# EAGLE board RH001.2 (EAGLE 7.1.0)
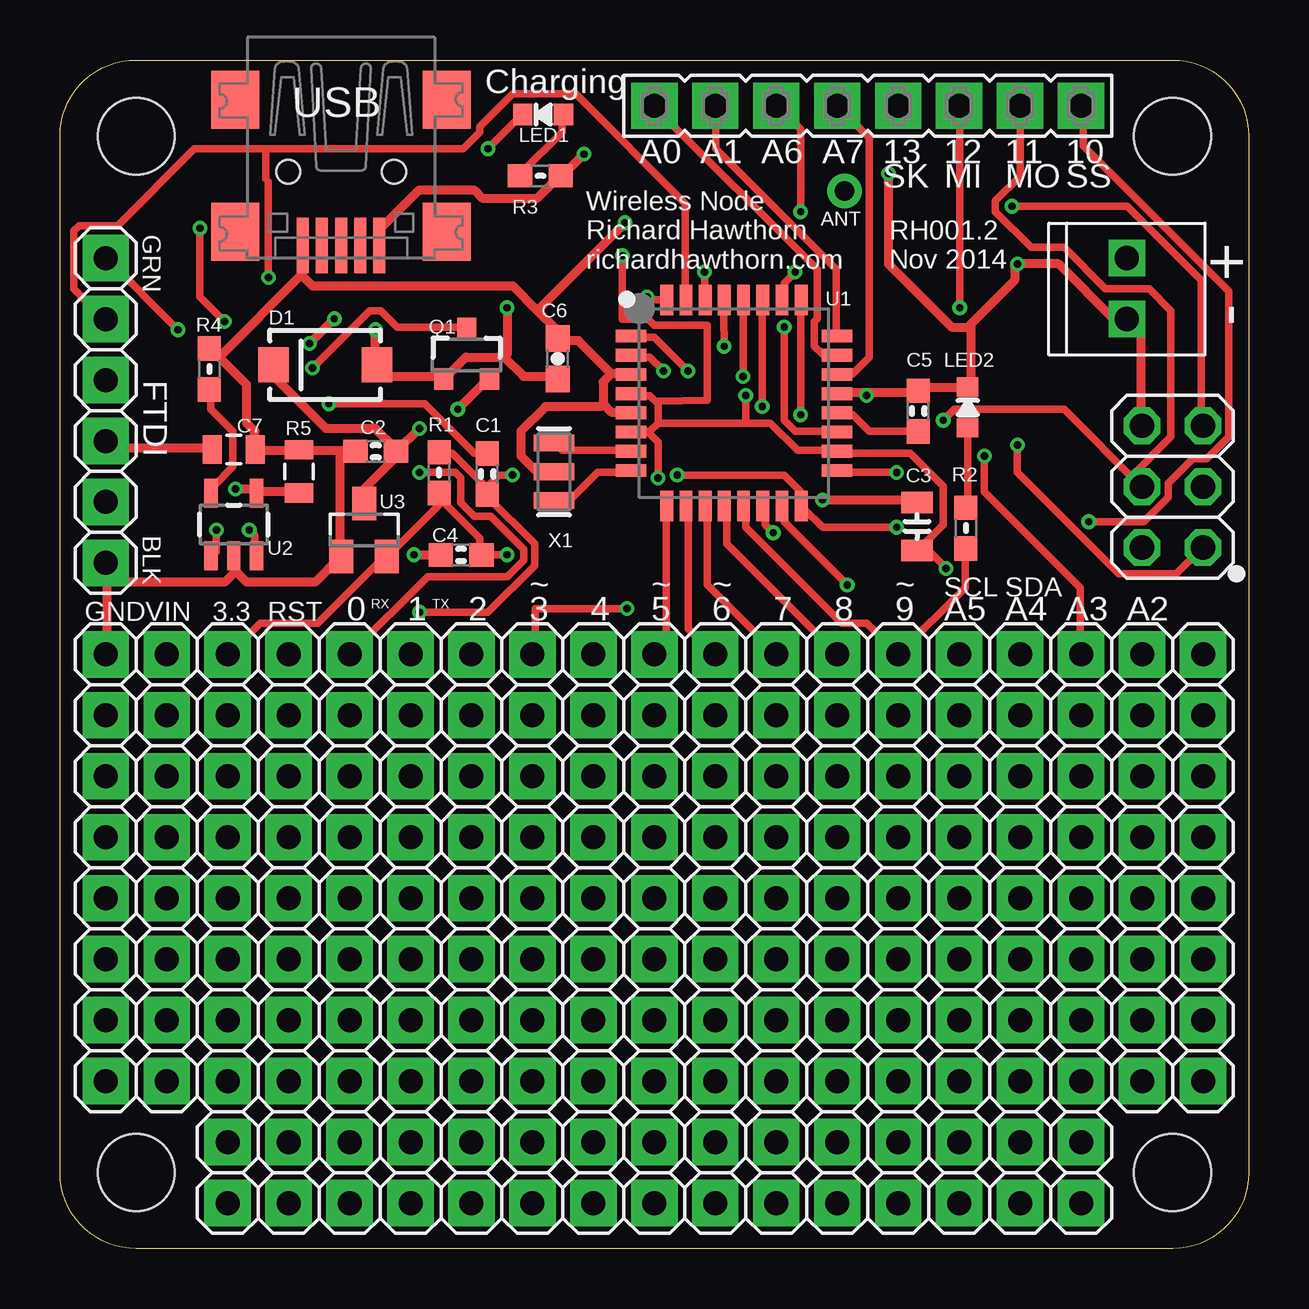
[diagram p0: board, top side]
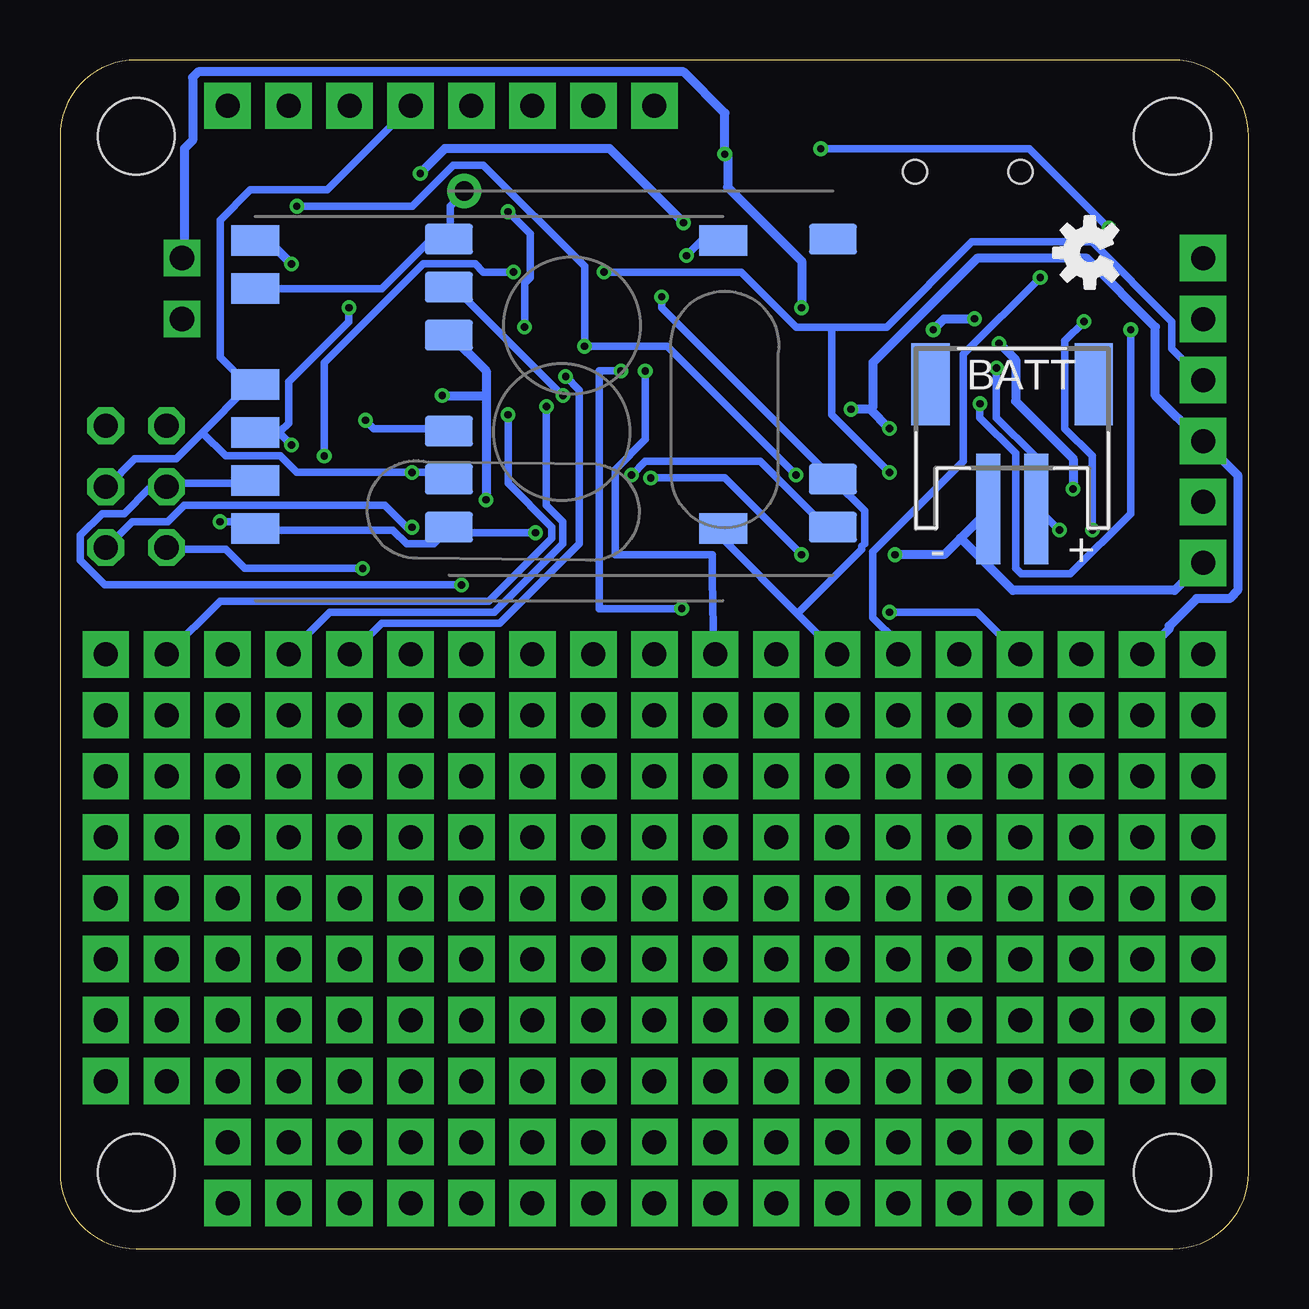
[diagram p1: board, bottom side, seen from below]

Size 49.53 x 49.53 mm. Coordinates in mm from the lower left corner, seen from the top.
Outline: 0,3.17 0,46.35 arc-90 3.17,49.53 46.35,49.53 arc-90 49.53,46.35 49.53,3.17 arc-90 46.35,0 3.17,0 arc-90 0,3.17
Copper layers (1*16): Top 0.035mm / dielectric 1.5mm / Bottom 0.035mm
Design rules "ITEADstudio_DRC *": minimum track width 12mil, minimum drill 12mil, track to track 6mil, track to pad 6mil, pad to pad 6mil, via to via 6mil, smd to smd 0mil, copper to edge 10mil, drill to drill 10mil, minimum pad ring 10mil, minimum via ring 6mil, stop-mask expansion 2mil, vias tented up to drill 100mil, thermal gap 15mil
Net classes: 1 power: width 0.381 mm, clearance 0.254 mm
Holes 3.2 mm at 3.17,3.17 46.35,3.17 3.17,46.35 46.35,46.35
tRestrict: area 24.3,8.9 to 29.1,12.8; area 5.8,16.9 to 6.9,18.5; area 5.2,9.7 to 6.7,10.4
bRestrict: area 27.4,17.7 to 29.2,18.7; area 21.1,13.8 to 22.9,14.9; area 21.6,12.6 to 22.1,13.2; area 20.7,12.6 to 21.2,13.2; area 20.2,12.8 to 20.7,13.5; area 20.1,13.4 to 20.6,14; area 26.5,18.9 to 27.1,19.5; area 26.5,17.9 to 27.1,18.5; area 27.5,19.1 to 28,19.8; area 27.9,18.8 to 29.1,19.6

## Footprints (pad centres in the part's own frame; a part is rotated, then mirrored left to right if it is on the bottom)
0603-CAP = smd 1.016 x 0.965: 1 -0.85,0; 2 0.85,0
0805-CAP = smd 0.902 x 1.3: 1 -1,0; 2 1,0
0603-CAP' = smd 1.1 x 1: 1 -0.85,0; 2 0.85,0
0805 = smd 0.8 x 1.2: 1 -0.9,0; 2 0.9,0
USB-MINIB = smd 0.5 x 2.308: D+ 0,4.064; D- -0.8,4.064; GND 1.6,4.064; ID 0.8,4.064; VBUS -1.6,4.064 | smd 2 x 2.4: GND1 -4.4,-2; GND2 -4.4,3.5; GND3 4.4,3.5; GND4 4.4,-2 | hole 1: -2.2,1; 2.2,1
JST-PH-2-SMT-RA = smd 1 x 4.6: 1 1,-3.7; 2 -1,-3.7 | smd 1.6 x 3.4: NC1 -3.4,1.5; NC2 3.4,1.5
1X06 = drill 1 pad 1.93 square: 1 -6.35,0; 2 -3.81,0; 3 -1.27,0; 4 1.27,0; 5 3.81,0; 6 6.35,0
FE08 = drill 1 pad 1.93 square: 1 -8.89,0; 2 -6.35,0; 3 -3.81,0; 4 -1.27,0; 5 1.27,0; 6 3.81,0; 7 6.35,0; 8 8.89,0
SMA-DIODE = smd 1.27 x 1.47: A -2.15,0; C 2.15,0
2X03 = drill 1.016 octagon: 1 -2.54,-1.27; 2 -2.54,1.27; 3 0,-1.27; 4 0,1.27; 5 2.54,-1.27; 6 2.54,1.27
1X02_2.54_SCREWTERM = drill 1.016 square: P1 2.54,0; P2 0,0
1X15 = drill 1 pad 1.93 square: 1 -17.78,0; 2 -15.24,0; 3 -12.7,0; 4 -10.16,0; 5 -7.62,0; 6 -5.08,0; 7 -2.54,0; 8 0,0; 9 2.54,0; 10 5.08,0; 11 7.62,0; 12 10.16,0; 13 12.7,0; 14 15.24,0; 15 17.78,0
1X19 = drill 1 pad 1.93 square: 1 -22.86,0; 2 -20.32,0; 3 -17.78,0; 4 -15.24,0; 5 -12.7,0; 6 -10.16,0; 7 -7.62,0; 8 -5.08,0; 9 -2.54,0; 10 0,0; 11 2.54,0; 12 5.08,0; 13 7.62,0; 14 10.16,0; 15 12.7,0; 16 15.24,0; 17 17.78,0; 18 20.32,0; 19 22.86,0
0603-LED = smd 0.8 x 0.9: MINUS -0.85,0; PLUS 0.85,0
SOT23-3 = smd 0.8 x 0.9: 1 -0.95,-1; 2 0.95,-1; 3 0,1.1
0603-RES = smd 1.016 x 0.965: 1 -0.85,0; 2 0.85,0
RFM12B-MINPADS = smd 2 x 1.27: ANT 8,-6; GND 8,-2; IRQ -8,4; SCK 8,4; SDI 8,2; SDI1 -8.002,-6.001; SDO -8,6; SEL 8,6; VDD 8,-4
RFM69W-MINPADS = smd 2 x 1.27: ANA 8,-5; DIO0 -11.5,5; GND 8,-7; MISO 8,1; MOSI 8,3; NSS 8,5; SCK 8,-1; VDD -11.5,-7
TQFP32-08 = smd 1.27 x 0.533: 1 -4.293,2.8; 2 -4.293,2; 3 -4.293,1.2; 4 -4.293,0.4; 5 -4.293,-0.4; 6 -4.293,-1.2; 7 -4.293,-2; 8 -4.293,-2.8; 17 4.293,-2.8; 18 4.293,-2; 19 4.293,-1.2; 20 4.293,-0.4; 21 4.293,0.4; 22 4.293,1.2; 23 4.293,2; 24 4.293,2.8 | smd 0.533 x 1.27: 9 -2.8,-4.293; 10 -2,-4.293; 11 -1.2,-4.293; 12 -0.4,-4.293; 13 0.4,-4.293; 14 1.2,-4.293; 15 2,-4.293; 16 2.8,-4.293; 25 2.8,4.293; 26 2,4.293; 27 1.2,4.293; 28 0.4,4.293; 29 -0.4,4.293; 30 -1.2,4.293; 31 -2,4.293; 32 -2.8,4.293
SOT23-5 = smd 0.55 x 1.2: 1 -0.95,-1.3; 2 0,-1.3; 3 0.95,-1.3; 4 0.95,1.3; 5 -0.95,1.3
SOT23 = smd 1 x 1.4: 1 -0.95,-1.1; 2 0.95,-1.1; 3 0,1.1
RFM12B-ANTENNA = drill 0.8 pad 1.422: P$1 0,0
RESONATOR-SMD = smd 0.7 x 1.7: 1 -1.2,0; 2 0,0; 3 1.2,0

## Placement (x,y rotation side)
C1  0.1  [0603-CAP]  17.81,32.28 90 top
C2  1u  [0603-CAP]  13.16,33.22 180 top
C3  10u  [0805-CAP]  35.71,30.1 90 top
C4  0.1  [0603-CAP]  16.71,28.91 180 top
C5  0.1  [0603-CAP]  35.76,34.9 90 top
C6  4u7  [0603-CAP']  20.74,37.08 90 top
C7  1 uF  [0805]  7.24,33.3 0 top
CN1  USB  [USB-MINIB]  11.71,45.87 180 top
CN3  BATT  [JST-PH-2-SMT-RA]  9.86,34.52 0 bottom
CN4  FTDI  [1X06]  1.91,34.92 90 top
CN5  1  [FE08]  33.66,47.62 0 top
D1  SCHOTTKY  [SMA-DIODE]  11.05,36.83 180 top
ICSP1  ICSP  [2X03]  46.35,31.75 90 top
IN1  M022.54MM_SCREWTERM  [1X02_2.54_SCREWTERM]  44.45,38.73 90 top
JP1  [1X15]  24.77,1.91 0 top
JP3  [1X19]  24.77,22.23 0 top
JP4  [1X19]  24.77,19.68 0 top
JP5  [1X19]  24.77,17.14 0 top
JP6  [1X19]  24.77,14.61 0 top
JP7  [1X19]  24.77,12.06 0 top
JP8  [1X19]  24.77,9.53 0 top
JP9  [1X19]  24.77,6.99 0 top
JP10  [1X15]  24.77,4.45 0 top
JP11  [1X19]  24.77,24.77 180 top
LED1  LED0603  [0603-LED]  20.13,47.26 0 top
LED2  LED0603  [0603-LED]  37.82,35.05 270 top
Q1  MOSFET  [SOT23-3]  16.94,37.24 0 top
R1  10k  [0603-RES]  15.8,32.33 90 top
R2  1k5  [0603-RES]  37.74,30.02 270 top
R3  1k5  [0603-RES]  20.02,44.7 180 top
R4  2K  [0603-RES]  6.22,36.65 270 top
R5  100 K  [0805]  9.96,32.38 270 top
RF1  RFM12B  [RFM12B-MINPADS]  25.32,36.07 180 bottom
RF2  RFM69  [RFM69W-MINPADS]  33.4,35 180 bottom
U1  ATMega-328  [TQFP32-08]  28.08,35.23 0 top
U2  MCP73831  [SOT23-5]  7.24,30.18 0 top
U3  MCP1703CB  [SOT23]  12.67,29.95 0 top
U$1  RFM12B_ANTENNA  [RFM12B-ANTENNA]  32.69,44.07 0 top
U$3  [OSHW-LOGO-S]  6.63,41.5 90 bottom
X1  16 MHz  [RESONATOR-SMD]  20.59,32.37 270 top

## Library data of the parts
C1-C5 CN1 LED1 LED2 R1-R4 RF1 RF2 U1 U$1 = LowPowerLab
C6 U2 X1 = SparkFun
C7 = SparkFun-Capacitors
CN3 = adafruit
CN4 ICSP1 JP1 JP3-JP11 = pinhead
CN5 = con-lsta; OC_FARNELL: unknown; OC_NEWARK: unknown
D1 Q1 = SparkFun-DiscreteSemi
IN1 = SparkFun-Connectors
R5 = SparkFun-Resistors
U3 = linear
U$3 = SparkFun-Aesthetics

## Nets
A0: CN5.1 U1.23
A1: CN5.2 U1.24
A2: JP11.2 U1.25
A3: JP11.3 U1.26
A4_SDA: JP11.4 U1.27
A5_SCL: JP11.5 U1.28
A6: CN5.3 U1.19
A7: CN5.4 U1.22
AREF: C5.1 U1.20
D0_RX: CN4.4 JP11.15 U1.30
D1_TX: CN4.5 JP11.14 U1.31
D2: JP11.13 RF1.IRQ RF2.DIO0 U1.32
D3: JP11.12 U1.1
D4: JP11.11 U1.2
D5: JP11.10 U1.9
D6: JP11.9 U1.10
D7: JP11.8 U1.11
D8: JP11.7 U1.12
D9: JP11.6 R2.2 U1.13
D10_SS: CN5.8 RF1.SEL RF2.NSS U1.14
D11_MOSI: CN5.7 ICSP1.4 RF1.SDI RF2.MOSI U1.15
D12_MISO: CN5.6 ICSP1.1 RF1.SDO RF2.MISO U1.16
D13_SCK: CN5.5 ICSP1.3 RF1.SCK RF2.SCK U1.17
GND [power]: C2.2 C3.2 C4.2 C5.2 C6.2 C7.2 CN1.GND CN3.2 CN4.1 ICSP1.6 IN1.P2 JP11.19 LED2.MINUS R4.1 R5.1 RF1.GND RF2.GND U1.3 U1.5 U1.21 U2.2 U3.1 X1.2
N$1: U1.7 X1.1
N$2: LED2.PLUS R2.1
N$3: RF1.ANT RF2.ANA U$1.P$1
N$4: LED1.PLUS R3.2
N$20: C1.2 CN4.6
N$21: U1.8 X1.3
PROG: R4.2 U2.5
PWR [power]: C2.1 C7.1 CN4.3 D1.C JP11.18 Q1.2 U3.3
RST: C1.1 ICSP1.5 JP11.16 R1.2 U1.29
STAT: LED1.MINUS U2.1
VBAT: CN3.1 Q1.3 U2.3
VBUS [power]: C6.1 CN1.VBUS D1.A IN1.P1 Q1.1 R3.1 R5.2 U2.4
VCC: C3.1 C4.1 ICSP1.2 JP11.17 R1.1 RF1.VDD RF2.VDD U1.4 U1.6 U1.18 U3.2

## Tracks (layer width: path | path; a pad name or v marks a point on that pad's centre or on a via)
A0
  Top 0.305: U1.23 32.35,37.26 31.77,37.26 31.43,37.6 31.43,38.63 31.55,38.75 31.55,40.8 24.8,47.55 CN5.1
A1
  Top 0.305: U1.24 32.35,38.06 32.35,40.8 27.32,45.83 27.32,47.55 CN5.2
A2  (via drill 0.3)
  Top 0.305: v30.86,34.75 30.86,39.43 U1.25
  Bottom 0.305: v30.86,34.75 30.86,31.89 29.03,30.06 29.03,29.6 31.66,26.98 42.86,26.98 45.03,24.8 JP11.2
A3  (via drill 0.3)
  Top 0.305: v30.63,40.69 30.18,40.23 30.18,39.55 U1.26 | v38.52,33.03 38.52,31.55 42.52,27.55 42.52,24.8 JP11.3
  Bottom 0.305: v30.63,40.69 31.89,40.69 32.23,41.03 34.4,41.03 38.52,36.92 v38.52,33.03
A4_SDA  (via drill 0.3)
  Top 0.305: v29.26,35.09 29.26,39.43 U1.27
  Bottom 0.305: v29.26,35.09 29.26,30.98 28.57,30.29 28.57,29.38 31.43,26.52 38.29,26.52 40.01,24.8 JP11.4
A5_SCL  (via drill 0.3)
  Top 0.305: v28.46,36.35 28.46,39.43 U1.28
  Bottom 0.305: v28.46,36.35 27.89,35.78 27.89,29.38 31.2,26.06 36.12,26.06 37.38,24.8 JP11.5
A6  (via drill 0.3)
  Top 0.305: v30.18,38.41 30.18,34.52 30.63,34.06 32.35,34.06 U1.19 | v30.86,43.2 30.86,46.63 29.95,47.55 CN5.3
  Bottom 0.305: v30.18,38.41 30.18,40.23 29.95,40.46 29.95,42.29 v30.86,43.2
A7
  Top 0.305: CN5.4 33.72,46.29 33.72,37.15 33.03,36.46 32.46,36.46 U1.22
AREF
  Top 0.305: C5.1 35.66,34.06 33.72,34.06 33.03,34.75 32.46,34.75 U1.20
D0_RX  (via drill 0.3)
  Top 0.305: v26.86,40.69 26.86,39.55 U1.30 | v14.97,32.35 16.46,32.35 16.69,32.12 16.69,31.09 17.26,30.52 17.95,30.52 19.32,29.15 19.32,28.69 18.63,28 15.32,28 12.12,24.8 JP11.15
  Bottom 0.305: v26.86,40.69 21.14,40.69 18.86,38.41 17.37,38.41 | 17.37,38.41 15.09,38.41 11.54,41.95 6.51,41.95 3.2,38.63 3.2,37.49 CN4.4 | v14.97,32.35 17.37,34.75 17.37,38.41
D1_TX  (via drill 0.3)
  Top 0.305: 8.57,45.83 5.6,45.83 2.4,42.63 0.8,42.63 0.57,42.41 0.57,40.01 1.83,38.75 CN4.5 | 8.57,45.83 16.8,45.83 17.49,46.52 17.49,46.75 18.86,48.12 21.49,48.12 26.06,43.55 26.06,39.55 U1.31 | v8.69,40.46 8.69,44.46 8.57,44.58 8.57,45.83
  Bottom 0.305: v8.69,40.46 11.89,37.26 11.89,32.8 15.66,29.03 15.66,26.29 14.63,25.26 14.63,24.8 JP11.14
D2  (via drill 0.3)
  Top 0.305: v24.46,39.66 24.57,39.55 25.26,39.55 U1.32
  Bottom 0.305: 18.8,26.46 17.14,24.8 JP11.13 | 18.8,26.46 21.83,29.49 21.83,29.95 RF2.DIO0 | v24.46,39.66 24.46,39.2 17.37,32.12 RF1.IRQ 17.26,32 16,30.75 16,29.38 16.12,29.26 16.12,29.15 18.8,26.46
D3  (via drill 0.3)
  Top 0.305: JP11.12 19.81,24.77 19.81,26.67 v23.62,26.67 | v26.16,36.58 24.77,37.97 23.79,37.97 U1.1
  Bottom 0.305: v23.62,26.67 27.05,26.67 27.05,36.58 v26.16,36.58
D4  (via drill 0.3)
  Top 0.305: v25.15,36.58 24.57,37.15 23.89,37.15 U1.2
  Bottom 0.305: v25.15,36.58 25.15,33.72 26.4,32.46 26.4,28.92 22.35,28.92 22.35,27.94 22.29,24.8 JP11.11
D5
  Top 0.305: JP11.10 25.26,25.26 25.26,30.86 U1.9
D6
  Top 0.305: U1.10 26.18,30.86 26.18,25.83 27.2,24.8 JP11.9
D7
  Top 0.305: U1.11 26.98,30.86 26.98,27.66 29.83,24.8 JP11.8
D8
  Top 0.305: JP11.7 27.77,29.38 27.77,30.86 U1.12
D9
  Top 0.305: R2.2 37.72,29.15 37.72,27.55 34.98,24.8 JP11.6 34.86,24.8 33.6,26.06 32.58,26.06 28.57,30.06 28.57,30.86 U1.13
D10_SS  (via drill 0.3)
  Top 0.305: v29.72,29.83 29.38,30.18 29.38,30.86 U1.14 | v42.86,30.29 45.15,30.29 46.18,31.32 46.18,31.89 47.21,32.92 47.78,32.92 48.69,33.83 48.69,39.89 42.63,45.95 42.63,47.55 CN5.8
  Bottom 0.305: v29.72,29.83 33.03,29.83 33.26,30.06 RF1.SEL 33.38,29.95 33.95,29.38 35.09,29.38 35.66,29.95 41.38,29.95 RF2.NSS 41.49,30.06 41.72,30.29 v42.86,30.29
D11_MOSI  (via drill 0.3)
  Top 0.305: v32.8,27.66 30.18,30.29 30.18,30.86 U1.15 | v36.8,34.52 37.26,34.98 41.83,34.98 45.03,31.77 ICSP1.4 44.69,32.23 46.29,33.83 46.29,39.09 45.38,40.01 43.55,40.01 41.83,41.72 40.46,41.72 38.98,43.2 38.98,43.66 40.01,44.69 CN5.7
  Bottom 0.305: v32.8,27.66 47.66,27.66 48.69,28.69 48.69,29.72 47.78,30.63 46.86,30.63 45.83,31.66 45.15,31.66 ICSP1.4 45.03,31.89 41.49,31.89 RF2.MOSI | v36.8,34.52 36.46,34.18 33.38,34.18 RF1.SDI
D12_MISO  (via drill 0.3)
  Top 0.305: v25.72,32.23 30.18,32.23 30.86,31.55 30.86,30.98 U1.16 30.98,30.86 31.77,30.06 v34.86,30.06 | v39.89,33.49 39.89,32.35 44.12,28.12 46.52,28.12 47.55,29.15 ICSP1.1 | v37.49,39.2 37.49,47.55 CN5.6
  Bottom 0.305: v25.72,32.23 25.15,32.8 20.34,32.8 17.72,30.18 17.37,30.18 RF1.SDO | 40.35,33.95 41.38,33.95 RF2.MISO | v39.89,33.49 40.35,33.95 | v37.49,39.2 37.49,38.63 40.01,36.12 40.01,34.4 40.35,34.06 40.35,33.95 | v34.86,30.06 35.09,30.06 36.01,30.98 44.35,30.98 45.03,30.29 46.52,30.29 47.55,29.26 ICSP1.1
D13_SCK  (via drill 0.3)
  Top 0.305: v34.86,32.35 32.46,32.35 U1.17
  Bottom 0.305: RF1.SCK 33.38,32.12 33.6,32.35 v34.86,32.35 39.66,32.35 40.35,33.03 42.63,33.03 43.6,34 | 43.6,34 44.69,32.92 46.41,32.92 47.55,31.77 ICSP1.3 | 43.6,34 41.72,35.89 41.49,35.89 RF2.SCK 41.72,36.01 42.86,37.15 42.86,42.86 41.6,44.12 38.41,44.12 34.98,47.55 CN5.5
GND  (via drill 0.3)
  Top 0.381: v31.77,31.2 35.66,31.2 C3.2 | 33.6,35.66 35.66,35.66 C5.2 35.78,35.78 35.89,35.89 37.72,35.89 LED2.MINUS 37.95,36.01 37.95,38.41 | 33.6,35.66 32.46,35.66 U1.21 | 37.95,38.41 37.95,38.52 39.78,40.35 39.78,40.92 v39.89,41.03 41.6,41.03 43.89,38.75 44.35,38.75 IN1.P2 44.58,38.63 45.03,38.18 45.03,34.29 ICSP1.6 | v33.6,35.55 33.6,35.66 | v14.74,28.92 15.77,28.92 C4.2 | JP11.19 1.94,24.8 1.94,28.57 CN4.1 2.06,27.77 6.86,27.77 7.32,28.23 | 22.97,36.46 21.6,37.83 20.8,37.83 C6.2 20.69,38.06 20.69,38.29 19.89,39.09 | 22.97,36.46 23.77,36.46 U1.3 | 22.63,35.2 22.97,34.86 23.77,34.86 U1.5 | 22.63,35.2 22.63,36.12 22.97,36.46 | X1.2 20.57,32.46 19.77,32.46 19.2,33.03 19.2,34.06 20.23,35.09 22.52,35.09 22.63,35.2 | 7.32,28.23 7.32,28.8 U2.2 | 7.32,28.23 7.77,27.77 10.63,27.77 11.66,28.8 U3.1 11.66,28.92 11.66,33.26 | 11.66,33.26 10.06,33.26 R5.1 9.83,33.26 8.23,33.26 C7.2 8.12,33.38 8.12,34.06 7.77,34.4 7.77,36.01 6.63,37.15 | 11.66,33.26 12.23,33.26 C2.2 | 6.63,37.15 6.29,37.49 R4.1 | 10.06,40.58 10.06,41.72 CN1.GND | 6.63,37.15 10.06,40.58 | 19.89,39.09 18.86,40.12 10.52,40.12 10.06,40.58 | 37.95,38.41 37.15,38.41 34.52,41.03 v34.52,44.81 | 19.89,39.09 v23.55,42.75
  Bottom 0.381: 31.77,35.55 31.77,36.58 33.26,38.06 RF1.GND | 31.77,35.55 v31.77,31.2 | 41.38,42.06 RF2.GND 41.26,41.95 40.8,41.95 v39.89,41.03 | v33.6,35.55 31.77,35.55 | v14.74,28.92 12.69,28.92 12,29.6 | 12,29.6 10.86,30.75 CN3.2 | 12,29.6 9.83,27.43 3.09,27.43 1.94,28.57 CN4.1 | v34.52,44.81 33.49,45.83 26.63,45.83 v23.55,42.75
N$1
  Top 0.305: U1.7 23.77,33.26 20.92,33.26 20.69,33.49 X1.1
N$2
  Top 0.305: LED2.PLUS 37.83,34.18 37.83,30.98 R2.1
N$3
  Bottom 0.305: U$1.P$1 32.69,44.01 33.26,43.43 33.26,42.18 RF1.ANT 33.38,41.95 34.18,41.95 36.12,40.01 41.38,40.01 RF2.ANA
N$4
  Top 0.305: LED1.PLUS 20.92,47.21 20.92,46.52 19.2,44.81 R3.2
N$20  (via drill 0.3)
  Top 0.305: v11.2,35.2 15.2,35.2 17.26,33.15 17.72,33.15 C1.2 | v4.92,38.29 1.94,41.26 CN4.6
  Bottom 0.305: v11.2,35.2 11.2,34.63 9.72,33.15 9.72,28.35 9.49,28.12 7.43,28.12 4.92,30.63 v4.92,38.29
N$21
  Top 0.305: U1.8 23.77,32.35 22.4,32.35 21.26,31.2 20.69,31.2 X1.3
PROG
  Top 0.305: R4.2 6.29,35.78 6.29,34.98 7.2,34.06 7.2,32.58 6.4,31.77 6.4,31.55 U2.5
PWR  (via drill 0.3)
  Top 0.381: v16.57,34.98 17.83,36.23 Q1.2 | v14.97,34.18 14.06,33.26 C2.1 | U3.3 12.69,31.09 12.69,31.66 14.06,33.03 C2.1 | D1.C 8.91,36.8 8.91,36.35 11.09,34.18 13.14,34.18 13.95,33.38 C2.1 | C7.1 6.29,33.38 2.17,33.38 1.94,33.6 CN4.3
  Bottom 0.381: 15.77,34.98 v16.57,34.98 | v14.97,34.18 15.77,34.98 | JP11.18 4.34,24.8 3.31,25.83 3.31,25.95 2.17,27.09 0.8,27.09 0.46,27.43 0.46,32.23 1.83,33.6 CN4.3 2.06,33.72 3.89,35.55 3.89,38.41 6.74,41.26 11.32,41.26 15.66,36.92 15.66,35.09 15.77,34.98
RST  (via drill 0.3)
  Top 0.305: R1.2 15.89,33.15 16.34,33.15 17.72,31.77 17.72,31.55 C1.1 | v27.67,37.6 27.66,38.86 27.66,39.43 U1.29 | v18.86,32.23 18.29,32.23 17.83,31.77 C1.1 | v39.66,43.43 44.46,43.43 47.55,40.35 47.55,34.29 ICSP1.5 | v14.97,26.52 17.83,26.52 19.77,28.46 19.77,29.38 17.83,31.32 C1.1
  Bottom 0.305: v18.86,32.23 24.23,37.6 v27.67,37.6 27.67,40.93 31.89,45.15 33.15,45.15 34.86,43.43 v39.66,43.43 | v14.97,26.52 11.32,26.52 9.6,24.8 JP11.16
STAT  (via drill 0.3)
  Top 0.305: v17.83,45.83 19.2,47.21 LED1.MINUS | v5.83,42.52 5.83,39.66 v6.86,38.63 | v6.51,29.95 6.51,29.03 6.4,28.92 U2.1
  Bottom 0.305: v17.83,45.83 9.14,45.83 v5.83,42.52 | v6.86,38.63 7.66,37.83 7.66,34.18 6.51,33.03 v6.51,29.95
VBAT  (via drill 0.3)
  Top 0.305: v10.52,36.69 12.92,39.09 13.37,39.09 14.06,38.41 16.92,38.41 Q1.3 | v7.89,29.95 8.12,29.72 8.12,28.92 U2.3
  Bottom 0.305: v10.52,36.69 10.52,34.63 8.91,33.03 8.91,30.86 CN3.1 8.8,30.86 v7.89,29.95
VBUS  (via drill 0.3)
  Top 0.381: R5.2 9.94,31.55 8.23,31.55 U2.4 8.12,31.66 v7.32,31.66 | 18.52,37.15 19.32,36.35 20.69,36.35 C6.1 | 18.52,37.15 16.92,37.15 16.12,36.35 Q1.1 15.89,36.35 13.72,36.35 13.26,36.8 D1.A 13.14,36.92 v13.14,38.29 | v11.43,38.75 v10.4,37.72 | CN1.VBUS 13.37,41.83 13.37,42.52 14.97,44.12 17.26,44.12 17.6,43.78 19.89,43.78 20.8,44.69 R3.1 21.03,44.81 v21.83,45.61 | v18.63,39.2 18.63,37.26 18.52,37.15
  Bottom 0.381: v7.32,31.66 7.32,32.92 9.72,35.32 9.72,37.03 v10.4,37.72 | v11.43,38.75 12.69,38.75 v13.14,38.29 | IN1.P1 44.35,41.38 44.35,45.83 44.01,46.18 44.01,48.81 43.78,49.03 23.55,49.03 21.83,47.32 v21.83,45.61 21.72,45.49 21.72,44.23 18.63,41.15 v18.63,39.2
VCC  (via drill 0.3)
  Top 0.305: JP11.17 7.09,24.8 8.34,26.06 10.74,26.06 13.49,28.8 U3.2 13.72,28.92 15.89,31.09 R1.1 15.89,31.43 15.89,31.2 17.49,29.6 17.49,28.92 C4.1 17.72,28.92 v18.63,28.92 | 24.57,34.06 23.89,34.06 U1.6 | 24.92,34.4 24.57,34.06 | 24.92,35.2 24.92,34.4 | 24.92,35.2 24.57,35.55 23.89,35.55 U1.4 | 28.57,34.4 29.6,34.4 30.75,33.26 32.23,33.26 U1.18 32.46,33.15 35.43,33.15 36.8,31.77 36.8,30.18 35.78,29.15 C3.1 36.01,29.26 v36.92,28.35 | 28.57,34.4 24.92,34.4 | 28.57,34.4 v28.57,35.55 | v23.43,41.38 23.43,38.73 24.51,38.73 24.77,38.48 26.98,38.48 26.98,35.34 24.92,35.32 24.92,35.2 | v24.92,32.12 24.92,33.6 24.57,33.95 24.57,34.06
  Bottom 0.305: 21.95,42.06 RF2.VDD 22.06,42.06 22.75,42.06 v23.43,41.38 | v28.57,35.55 33.03,40.01 33.26,40.01 RF1.VDD | v36.92,28.35 41.83,28.35 42.63,29.15 45.03,29.15 ICSP1.2 | v18.63,28.92 21.83,32.12 v24.92,32.12

## Text on the board
tNames: Charging | A0 | A1 | A6 | A7 | 13 | 12 | 11 | 10 | SK | MI | MO | SS | ANT | GRN | + | Wireless Node / Richard Hawthorn / richardhawthorn.com | RH001.2 / Nov 2014 | - | FTDI | BLK | RX | TX | ~ | ~ | ~ | ~ | SCL | SDA | GND | VIN | 3.3 | RST | 0 | 1 | 2 | 3 | 4 | 5 | 6 | 7 | 8 | 9 | A5 | A4 | A3 | A2
tDocu: REG